# Altium PCB PowerMonitoring.PcbDoc
Units mil, origin at the board's own origin, x right, y up, seen from the top; angles counter-clockwise.
Board outline 3150 x 5906 mil, 2 copper layers (Top Layer, Bottom Layer); 66 components, 41 nets, 204 pads, 2 vias.
Unrouted connection lines stored in the file: 114.
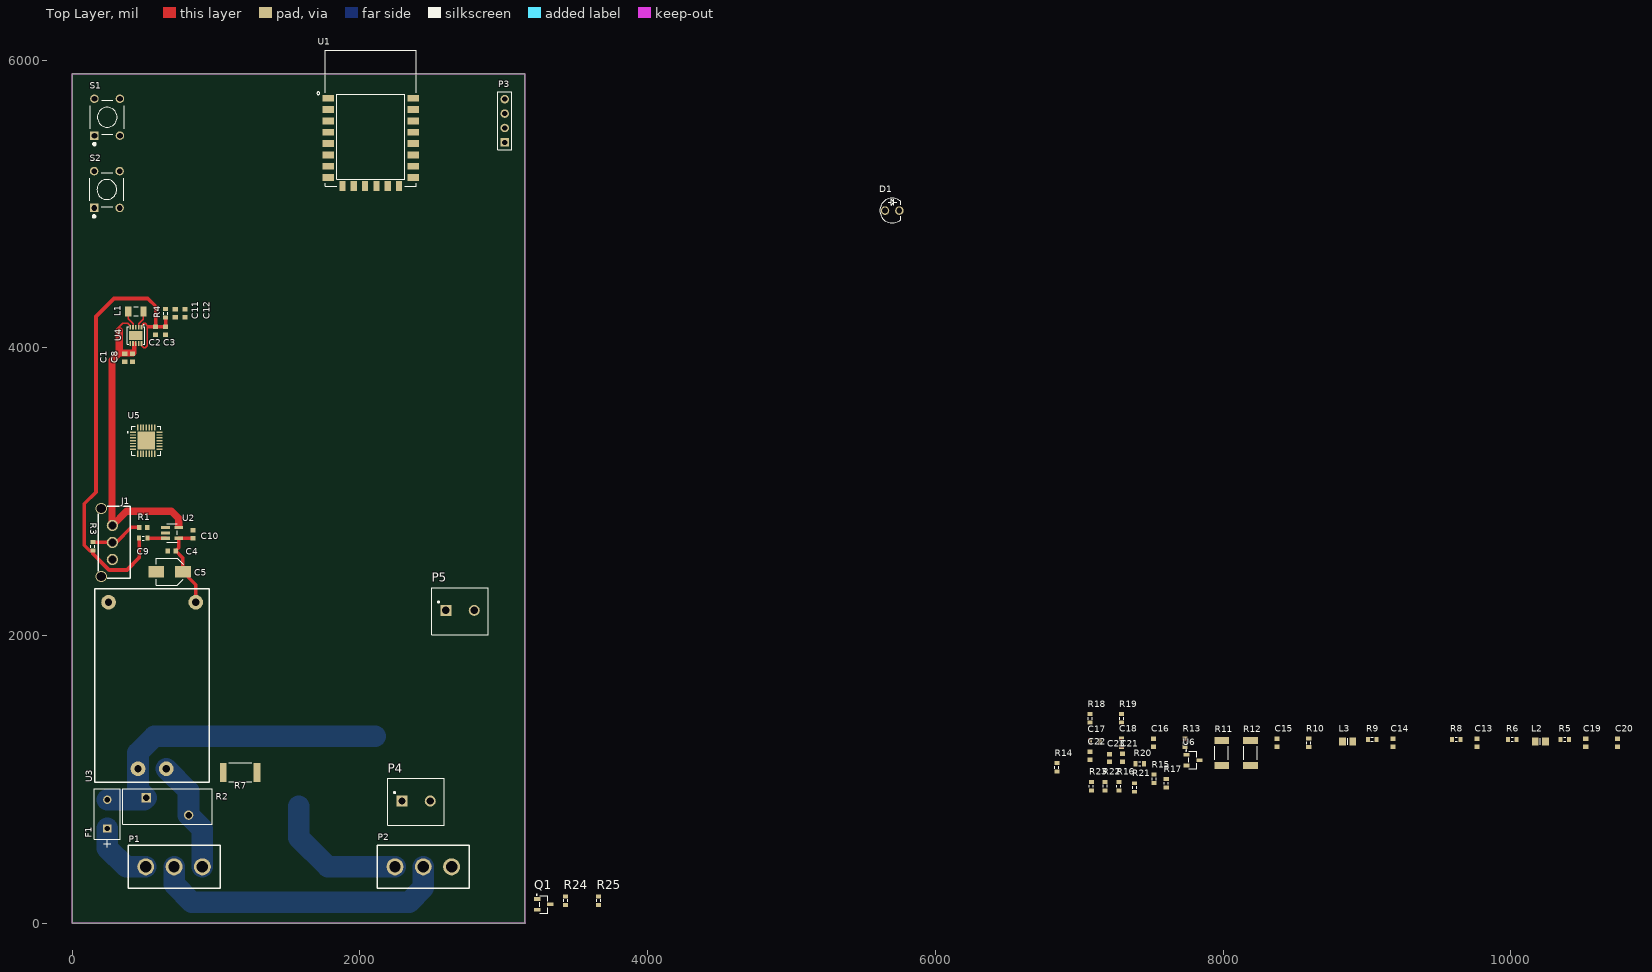
[diagram p0: Top Layer view]
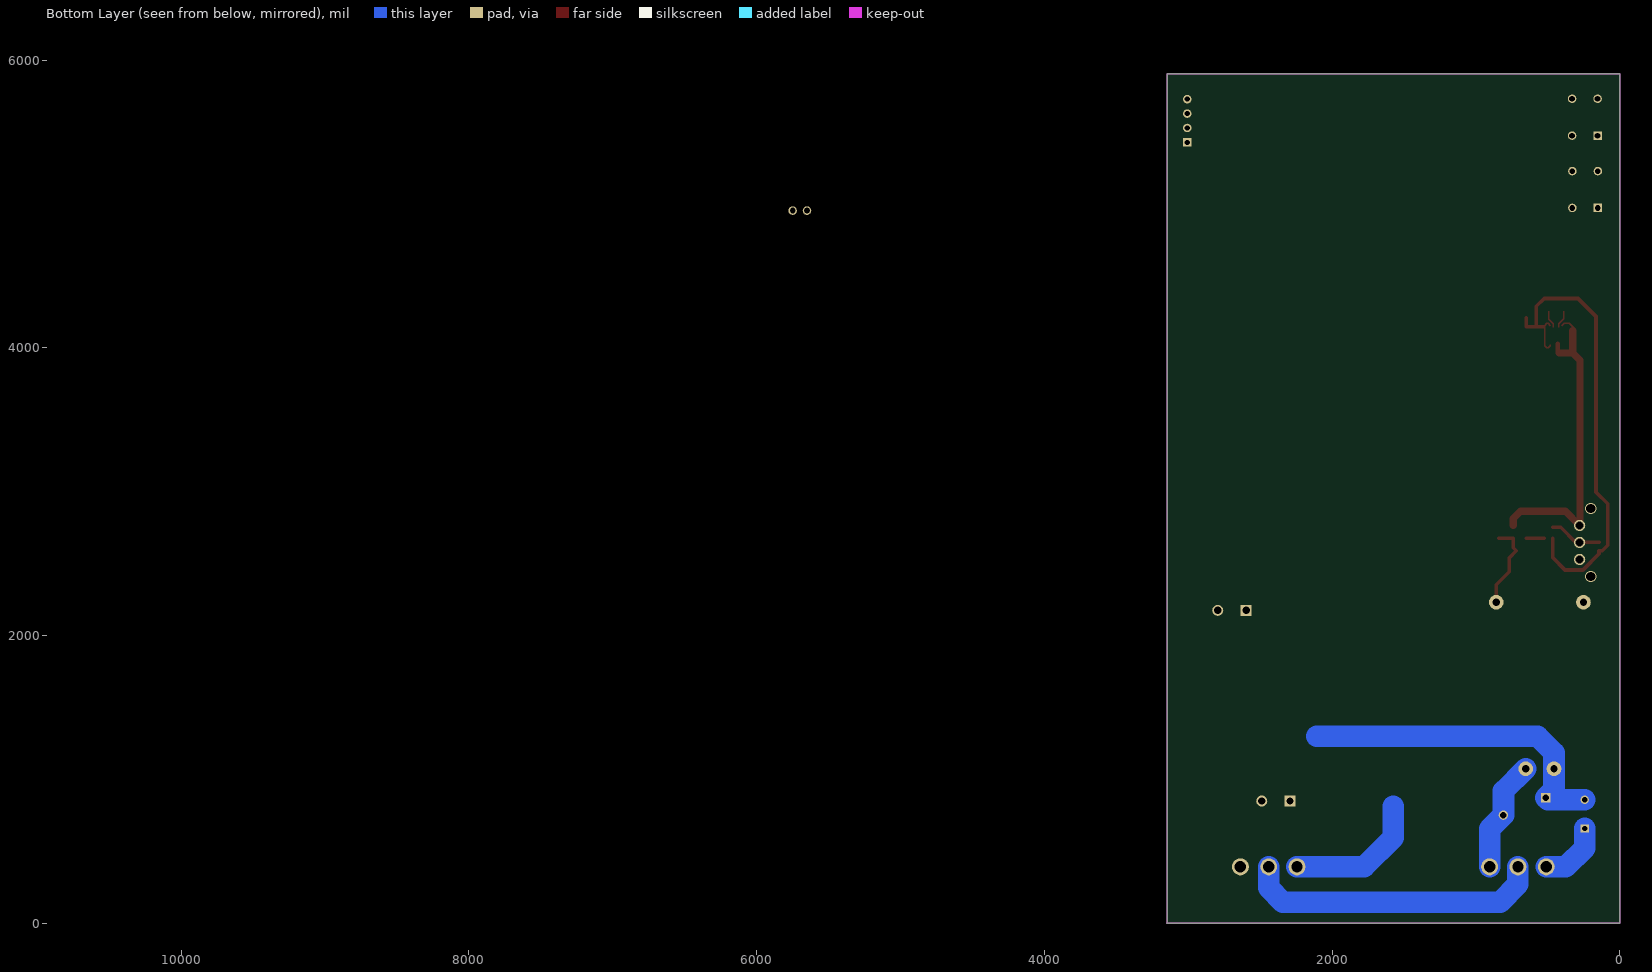
[diagram p1: Bottom Layer view, seen from below]

## Layer stack, top to bottom
Top Solder: solder mask 0.4, Solder Resist, Dk 3.5
Top Layer: signal copper 1.4
Dielectric 1: dielectric 12.6, FR-4, Dk 4.8
Bottom Layer: signal copper 1.4
Bottom Solder: solder mask 0.4, Solder Resist, Dk 3.5

## Board outline
0,0 0,5906 3146,5906 3146,4 3150,0

## Design rules (kind name [scope] priority, off if disabled: settings)
Clearance [All] p1: gap=10 ignorepadtopadclearanceinfootprint=FALSE except(0: Arc-Hole Track-Hole SMDPad-Hole THPad-Hole Via-Hole Fill-Hole Poly-Hole Region-Hole Text-Hole; 7.5: Arc-SMDPad Track-SMDPad SMDPad-SMDPad)
PolygonConnect [All] p1: connectstyle=Relief reliefconductorwidth=10 reliefentries=4 polygonreliefangle="90 Angle" airgapwidth=10
RoutingVias [All] p1: holewidth=28 width=50 viastyle="Through Hole" minholewidth=28 minwidth=50 maxholewidth=28 maxwidth=50
SolderMaskExpansion [All] p1: expansion=4
Width [All] p1: maxlimit=200 minlimit=10 preferedwidth=100 minimp=50.000000 maximp=50.000000 favimp=50.000000
30 further rules are at their usual default settings.

## Classes and differential pairs
component class Meter: C13 C14 C15 C16 C17 C18 C19 C20 C21 C22 L2 L3 R5 R6 R7 R8 R9 R10 R11 R12 R13 R14 R15 U5 U6
component class PowerSupply: C1 C2 C3 C4 C5 C8 C9 C10 C11 C12 F1 J1 L1 P1 P2 P4 P5 Q1 R1 R2 R3 R4 R24 R25 U2 U3 U4
component class CoreProcessor: C23 D1 P3 R16 R17 R18 R19 R20 R21 R22 R23 S1 S2 U1

## Components (designator, comment, footprint, x,y, rotation, side; value= is the part's Value field where it differs from the comment)
C1 "MUDAR FOOTPRINT" 1608[0603] 366,3932 r90 top value=10uF
C2 "MUDAR FOOTPRINT" 1608[0603] 581,4120 r90 top value=10uF
C3 "MUDAR FOOTPRINT" 1608[0603] 650,4119.56 r90 top value=10uF
C4 "MUDAR FOOTPRINT" 1608[0603] 692.56,2590 r0 top value=1uF
C5 "Cap Pol1" EEE-1VA100WR 675,2445 r180 top value=10uF
C8 "MUDAR FOOTPRINT" 1608[0603] 421,3932.56 r90 top value=1uF
C9 "MUDAR FOOTPRINT" 1608[0603] 495,2753 r180 top value=1uF
C10 "MUDAR FOOTPRINT" 1608[0603] 840,2705.56 r270 top value=0.1uF
C11 "MUDAR FOOTPRINT" 1608[0603] 717,4242 r90 top value=10uF
C12 "MUDAR FOOTPRINT" 1608[0603] 784,4242 r90 top value=0.1uF
C13 "MUDAR FOOTPRINT" 1608[0603] 9765,1255 r90 top value=33nF
C14 "MUDAR FOOTPRINT" 1608[0603] 9180,1255 r90 top value=33nF
C15 "MUDAR FOOTPRINT" 1608[0603] 8375,1255 r90 top value=33nF
C16 "MUDAR FOOTPRINT" 1608[0603] 7515,1255 r90 top value=33nF
C17 "MUDAR FOOTPRINT" C0805 7110,1265 r0 top value=10uF
C18 "MUDAR FOOTPRINT" 1608[0603] 7295,1255 r90 top value=0.1uF
C19 "MUDAR FOOTPRINT" 1608[0603] 10520,1255 r90 top value=0.1uF
C20 "MUDAR FOOTPRINT" 1608[0603] 10740,1255 r90 top value=0.1uF
C21 "MUDAR FOOTPRINT" 1608[0603] 7300,1152.56 r90 top value=0.1uF
C22 "MUDAR FOOTPRINT" 1608[0603] 7075,1165 r90 top value=0.1uF
C23 "MUDAR FOOTPRINT" 1608[0603] 7210,1150 r90 top value=0.1uF
D1 "LED0" LED-3MM-ROUND 5700,4955 r0 top
F1 "RSTA 1 AMMO" RSTA 245,860 r90 top
J1 "Battery_Connector" Battery_Connector 202.83,2648.11 r270 top
L1 "Inductor" INDC3216 443,4254 r0 top value=10mH
L2 "FERRITE BEAD" 6-0805_N 10205,1265 r0 top value=10mH
L3 "FERRITE BEAD" 6-0805_N 8865,1265 r0 top value=10mH
P1 "SUPPLY" TERM_BLOCK 708.66,393.7 r0 top
P2 "LOAD" TERM_BLOCK 2440.95,393.7 r0 top
P3 "PROG_HEADER" HDR1X4 3007,5429 r90 top
P4 "1935161" PHOENIX_1935161 2391,851 r0 top
P5 "1935161" PHOENIX_1935161 2696.57,2176 r0 top
Q1 "BSS138" MCP9700 3278,133 r0 top
R1 "Res3" J1-0603 495,2678 r180 top value=1K
R2 "ERZ-V14D431" VARISTOR 810,753 r0 top value=V14E275P
R3 "Res3" J1-0603 145,2620.47 r270 top value=1K
R4 "Res3" J1-0603 650,4240 r90 top value=33R
R5 "Res3" J1-0603 10375,1280 r0 top value=4.7K
R6 "Res3" J1-0603 10010,1280 r0 top value=1K
R7 "SHUNT" RES2512 1168,1051 r180 top value=1K
R8 "Res3" J1-0603 9620,1280 r0 top value=2.49R
R9 "Res3" J1-0603 9035,1280 r0 top value=1K
R10 "Res3" J1-0603 8595,1255 r90 top value=1K
R11 "Res3" 12Z-2010 7990,1185 r90 top value=499K
R12 "Res3" 12Z-2010 8190,1185 r90 top value=499K
R13 "Res3" J1-0603 7735,1255 r90 top value=1K
R14 "Res3" J1-0603 6845,1084.53 r90 top value=4.7K
R15 "Res3" J1-0603 7520,1004.53 r90 top value=100R
R16 "Res3" J1-0603 7275,954.53 r270 top value=10K
R17 "Res3" J1-0603 7605,974.53 r90 top value=2.1K
R18 "Res3" J1-0603 7075,1425 r90 top value=10K
R19 "Res3" J1-0603 7295,1425 r90 top value=10K
R20 "Res3" J1-0603 7420.47,1110 r0 top value=470R
R21 "Res3" J1-0603 7385,945 r90 top value=10K
R22 "Res3" J1-0603 7180,955 r90 top value=2.1K
R23 "Res3" J1-0603 7085,954.53 r90 top value=10K
R24 "Res3" J1-0603 3430,159 r90 top value=1K
R25 "Res3" J1-0603 3660,159 r90 top value=1K
S1 "FSM8JH" SW_FSM8JH 244,5604 r90 top
S2 "FSM8JH" SW_FSM8JH 241.58,5101.05 r90 top
U1 "ESP-12F" XCVR_ESP8266-12E/ESP-12E 2076,5460 r0 top
U2 "MAX1555EZK+T" MAX1555 695,2715 r0 top
U3 "HLK-PM01" HLK-PM01 556.57,1075 r90 top
U4 "ADP2504_3.3" ADP2504 443,4087 r270 top
U5 "MCP39F521" MCP39F521 515.32,3355.73 r0 top
U6 "MCP9700T-E/TT" MCP9700 7790,1135 r0 top

## Footprints (in the part's own frame and the unit in brackets; to place one, negate y for a bottom-side part, rotate by r counter-clockwise, add the part's x,y. Pads: shape width x height; smd on the part's side, far side on the other; paste and mask are expansions set on the pad)
6-0805_N [mm] "Chip Resistor, Body 2.0x1.2mm, IPC Medium Density"
  rect 1.2x1.4 smd: 1(-0.9,0) 2(0.9,0)
  silkscreen extent 0,-0.6 0,0.6, body extent -1.07,-0.7 1.07,0.7, height 0.7
12Z-2010 [mm] "Chip Resistor, Body 5.0x2.5mm, IPC High Density"
  rect 1.2x2.6 smd: 1(-2.2,0) 2(2.2,0)
  silkscreen extent -1.2,-1.2 1.2,1.2, body extent -2.58,-1.33 2.58,1.33, height 0.9
1608[0603] [mm] "Chip Capacitor, Body 1.6x0.8mm, IPC High Density"
  rect 0.8x0.9 smd: 1(-0.7,0) 2(0.7,0)
  body extent -0.87,-0.48 0.87,0.48, height 1.3
ADP2504 [mm] "SON50P300X300X80-11N"
  rect 0.84x0.27 smd: 1(-1.44,1) 2(-1.44,0.5) 3(-1.44,0) 4(-1.44,-0.5) 5(-1.44,-1) 6(1.44,-1) 7(1.44,-0.5) 8(1.44,0) 9(1.44,0.5) 10(1.44,1)
  rect 1.64x2.38 smd: 11(0,0)
  silkscreen extent -1.95,-1.55 1.55,1.55, body extent -1.55,-1.55 1.55,1.55, height 0.79
Battery_Connector [mm] "Battery_Connector"
  round 2 hole 1.4: 1(-3,1.96) 2(0,1.96) 3(3,1.96)
  silkscreen extent -6.35,-0.51 6.35,5.08, body extent -6.32,-0.51 6.33,5.1, height 9.95
C0805 [mil]
  rect 27.56x47.24 smd: 1(-33.46,0) 2(33.46,0)
EEE-1VA100WR [mil] "CAP_LM1117"
  rect 110x78 smd: 1(-95,0) 2(90,0)
  silkscreen extent -96,-94 91,94, body extent -108,-88 109,89, height 219
HDR1X4 [mm] "Connector; Header; 4 Position"
  rect 1.5x1.5 hole 0.9: 1(0,0)
  round 1.5 hole 0.9: 2(2.54,0) 3(5.08,0) 4(7.62,0)
  silkscreen extent -1.27,-1.27 8.89,1.27
HLK-PM01 [mm] "5V/3W POWER SUPPLY"
  round 2.6 hole 1.3: 1(0,2.5) 2(0,-2.5) 3(29.4,7.7) 4(29.4,-7.7)
  silkscreen extent -2.41,-10.1 31.75,10.1, body extent -2.27,-10.17 31.73,10.03, height 15.12
INDC3216 [mm] "Chip Inductor, Body 3.2x1.6mm, IPC High Density"
  rect 1.1x1.8 smd: 1(-1.35,0) 2(1.35,0)
  silkscreen extent -0.4,-0.8 0.4,0.8, body extent -1.7,-0.9 1.7,0.9, height 0.55
J1-0603 [mm] "Chip Resistor, Body 1.6x0.8mm, IPC High Density"
  rect 0.7x0.9 smd: 1(-0.75,0) 2(0.75,0)
  silkscreen extent -0.2,-0.35 0.2,0.35, body extent -0.85,-0.48 0.85,0.48, height 0.9
LED-3MM-ROUND [mm]
  round 1.508 hole 1: 1(1.27,0) 2(-1.27,0)
  silkscreen extent -2.19,-2.19 1.5,2.19, body extent -2,-2 1.5,2, height 6.05
MAX1555 [mil]
  rect 60x22 smd: 1(-46,37.4) 2(-46,0) 3(-46,-37.4) 4(46,-37.4) 5(46,37.4)
  silkscreen extent -37,-64 37,64, body extent -54,-59 54,59, height 43
MCP39F521 [mm] "QFN50P500X500X100-29N"
  rect 1.11x0.26 smd: 1(-2.33,1.5) 2(-2.33,1) 3(-2.33,0.5) 4(-2.33,0) 5(-2.33,-0.5) 6(-2.33,-1) 7(-2.33,-1.5) 15(2.33,-1.5) 16(2.33,-1) 17(2.33,-0.5) 18(2.33,0) 19(2.33,0.5) 20(2.33,1) 21(2.33,1.5)
  rect 0.26x1.11 smd: 8(-1.5,-2.33) 9(-1,-2.33) 10(-0.5,-2.33) 11(0,-2.33) 12(0.5,-2.33) 13(1,-2.33) 14(1.5,-2.33) 22(1.5,2.33) 23(1,2.33) 24(0.5,2.33) 25(0,2.33) 26(-0.5,2.33) 27(-1,2.33) 28(-1.5,2.33)
  rect 3.15x3.15 smd: 29(0,0)
  silkscreen extent -3.35,-2.58 2.58,2.58, body extent -2.58,-2.58 2.58,2.58, height 0.9
MCP9700 [mm] "SOT95P237X112-3N"
  rect 1.1x0.65 smd: 1(-1.15,0.95) 2(-1.15,-0.95) 3(1.15,0)
  silkscreen extent -1.3,-1.55 0.69,1.8, body extent -1.3,-1.45 1.3,1.45, height 1
PHOENIX_1935161 [mm]
  rect 1.95x1.95 hole 1.3: 1(-2.5,0)
  round 1.95 hole 1.3: 2(2.5,0)
  silkscreen extent -5,-4.3 5,4, body extent -5,-4.25 5,4.25, height 15.6
RES2512 [mil]
  rect 47x132 smd: 1(-117,0) 2(117,0)
  silkscreen extent -80,-66 80,66, body extent -124,-61 124,61, height 22
RSTA [mil]
  rect 58x58 hole 38 mask-1000: 1(-200,0)
  round 58 hole 38 mask-1000: 2(0,0)
  silkscreen extent -330,-90 76,90, body extent -271,-84 71,84, height 319
SW_FSM8JH [mm]
  rect 1.498x1.498 hole 0.99: 1(-3.25,2.25)
  round 1.498 hole 0.99: 2(3.25,2.25) 3(-3.25,-2.25) 4(3.25,-2.25)
  silkscreen extent -4.95,-3 3,3, body extent -3.9,-2.99 3.9,3, height 9.5
TERM_BLOCK [mm] "BLUE"
  round 3 hole 2: 1(-5,0) 2(0,0) 3(5,0)
  silkscreen extent -8.13,-3.81 8.13,3.81, body extent -8.1,-3.75 8.1,3.75, height 9.95
VARISTOR [mil] "RES_ERZV14_155X6"
  rect 65x65 hole 45 mask-1000: 1(-295,122)
  round 65 hole 45 mask-1000: 2(0,0)
  silkscreen extent -458,-62 162,184, body extent -450,-58 160,178, height 728
XCVR_ESP8266-12E/ESP-12E [mm]
  rect 2x1.2 smd: 1(-7.5,7) 2(-7.5,5) 3(-7.5,3) 4(-7.5,1) 5(-7.5,-1) 6(-7.5,-3) 7(-7.5,-5) 8(-7.5,-7) 15(7.5,-7) 16(7.5,-5) 17(7.5,-3) 18(7.5,-1) 19(7.5,1) 20(7.5,3) 21(7.5,5) 22(7.5,7)
  rect 1.1x1.7 smd: 9(-5,-8.5) 10(-3,-8.5) 11(-1,-8.5) 12(1,-8.5) 13(3,-8.5) 14(5,-8.5)
  silkscreen extent -9.5,-8.5 8,15.5, body extent -7.95,-8.51 8.06,15.49, height 2.65

## Part data
C1 C2 C3 C4 C8 C9 C10 C11 C12 C13 C14 C15 C16 C17 C18 C19 C20 C21 C22 C23: library part "Cap Semi", "Capacitor (Semiconductor SIM Model)", LatestRevisionDate=29-May-2009, LatestRevisionNote="IPC-7351 Footprint Added.", PackageDescription="Chip Capacitor", PackageReference=C1206, Published=8-Jun-2000, Publisher="Altium Limited"
C5: "Polarized Capacitor (Radial)", LatestRevisionDate=17-Jul-2002, LatestRevisionNote="Re-released for DXP Platform.", PackageDescription="Polarized Capacitor (Radial); 2 Leads", PackageReference=RB7.6-15, Published=8-Jun-2000, Publisher="Altium Limited"
D1: "Typical INFRARED GaAs LED", LatestRevisionDate=08-Jul-2005, LatestRevisionNote="Mech Layer 1 removed.", PackageDescription="LED; 2 Leads", PackageReference=LED-0, Published=8-Jun-2000, Publisher="Altium Limited"
L2 L3: library part "Inductor Iron", "Magnetic-Core Inductor", Supplier Part Number 1=240-2384-6-ND, LatestRevisionDate=17-Jul-2002, LatestRevisionNote="Re-released for DXP Platform.", PackageDescription="Axial Device, Thru-Hole; 2 Leads; 0.9 in Pin Spacing", PackageReference=AXIAL-0.9, Published=24-Mar-1999, Publisher="Altium Limited", Supplier 1=Digi-Key
P1 P2: library part "Header 3", "Header, 3-Pin", LatestRevisionDate=17-Jul-2002, LatestRevisionNote="Re-released for DXP Platform.", Publisher="Altium Limited"
P3: library part "Header 4", "Header, 4-Pin", LatestRevisionDate=17-Jul-2002, LatestRevisionNote="Re-released for DXP Platform.", Publisher="Altium Limited"
P4 P5: library part "Header 2", "Header, 2-Pin", LatestRevisionDate=17-Jul-2002, LatestRevisionNote="Re-released for DXP Platform.", Publisher="Altium Limited"
Q1: library part NMOS-2, "N-Channel Power MOSFET", ComponentLink1Description="Manufacturer Link", ComponentLink1URL=http://www.irf.com/, DatasheetVersion=PD-9.814, LatestRevisionDate=17-Jul-2002, LatestRevisionNote="Re-released for DXP Platform.", Note="Pin 2 is electrically connected to pin 4.", PackageDescription="TO, Thru-Hole, Vertical, Heatsink Mounted; 3 In-Line Leads; Pitch 2.54 mm", PackageReference=TO-220AB, PackageVersion=Feb-1997, Published=8-Jun-2000, Publisher="Altium Limited"
R1 R3 R4 R5 R6 R8 R9 R10 R11 R12 R13 R14 R15 R16 R17 R18 R19 R20 R21 R22 R23 R24 R25: "Resistor", LatestRevisionDate=29-May-2009, LatestRevisionNote="IPC-7351 Footprint Added.", PackageDescription="Chip Resistor", PackageReference=J1-0603, Published=8-Jun-2000, Publisher="Altium Limited"
R7: library part Res3, "Resistor", Supplier Part Number 1=CSNL2512FT2L00DKR-ND, LatestRevisionDate=29-May-2009, LatestRevisionNote="IPC-7351 Footprint Added.", PackageDescription="Chip Resistor", PackageReference=J1-0603, Published=8-Jun-2000, Publisher="Altium Limited", Supplier 1=Digi-Key
S1 S2: library part BUTTON, "Switch, Pushbutton, Tactile, SPST, Thru Hole, Vertical, 6MM, Black", Package=None, Availability=Good, MF="TE Connectivity / Alcoswitch", MP=FSM8JH, Price="0.07 USD", SnapEDA_Link=https://www.snapeda.com/parts/FSM8JH/TE%2520Connectivity%2520/%2520Alcoswitch/view-part/?ref=snap
U2: "Charger IC Lithium-Ion TSOT-23-5", Built_By=EMA_UL_Team, C="Copyright (C) 2015 Accelerated Designs. All rights reserved", Manufacturer_Part_Number=MAX1555EZK+T, Vendor="Maxim Integrated Products"
U4: library part ADP2504_3.3V, "Buck-Boost Switching Regulator IC Positive Fixed 3.3V 1 Output 1A 10-WFDFN Exposed Pad, CSP"
U5: Supplier Part Number 1=MCP39F521-E/MQ-ND, Supplier 1=Digi-Key
U6: "MCP9700 Series 5 V -40 to +125°C Low-Power Linear Active Thermistor", Package="SOT-23-3 Microchip", Availability=Unavailable, MF=Microchip, MP=MCP9700T-E/TT, Price=None, SnapEDA_Link=https://www.snapeda.com/parts/MCP9700T-E/TT/Microchip/view-part/?ref=snap
F1: Built_By=EMA_UL_Team, Manufacturer_Part_Number="RSTA 1 AMMO", Vendor=BelFuse
L1: Code_IEC=1005, Code_JEITA=0402, LatestRevisionDate=29-May-2009, LatestRevisionNote="IPC-7351 Footprint Added.", PackageDescription="Chip Inductor", PackageReference=0402-A, Published=8-Jun-2000, Publisher="Altium Limited"
R2: Built_By=EMA_UL_Team, C="Copyright (C) 2015 Accelerated Designs. All rights reserved", Manufacturer_Part_Number=ERZ-V14D431, Vendor=Panasonic

## Via types
v1: diameter 78.74, hole 62.99, Top Layer to Bottom Layer, 2 vias

## Nets (pads, with @x,y where several pads share a name; then routed paths per layer and width w, separated by ;. In a path a pad name is that pad's centre, name@x,y a point inside that pad or via, vN(x,y) a via of type N, cw(c..) or ccw(c..) an arc to the next point about the centre after c; other vN are vias at no path point)
+3.3: C2.2 C3.2 C20.2 C23.2 D1.1 P3.1 Q1.1 R1.2 R3.2 R4.1 R5.1 R14.2 R16.1 R17.2 R18.2 R19.2 R22.2 R23.1 R24.2 U1.8 U4.1 U4.10 | length 3323.5
  Top Layer w10: U4.10@483,4021 483,4017 499,4001 509,4001 523,4015 523,4156 509,4170 498,4170 U4.1@483,4155
  Top Layer w25: R1.2 465.47,2540.94 381.53,2457 257,2457 145,2569 R3.2 122.06,2590.94 85,2628 85,2917 166,2998 166,4219 291,4344 526,4344 581,4289 C2.2 ; 531,4147.56 C2.2 ; R4.1 C3.2 649.56,4147.56 C2.2
+3.3A: C11.2 C12.2 C19.2 R4.2 U5.11 U5.25
+5: C4.2 C5.1 C10.2 P5.1 R25.2 U2.4 U3.4 | length 610.8
  Top Layer w25: C10.2 741.4,2678 U2.4 741,2610.88 C4.2 770,2540.12 C5.1 859.72,2355.28 U3.4
AGND: C1.1 C2.1 C3.1 C4.1 C5.2 C8.1 C9.1 C10.1 C11.1 C12.1 C13.1 C14.2 C15.1 C16.1 C17.1 C18.1 C19.1 C20.1 C21.1 C22.1 C23.1 J1.3 P3.4 R10.2 R13.2 R21.2 S1.1 S1.2 S2.1 S2.2 U1.15 U2.2 U3.3 U4.3 U4.6 U4.9 U4.11 U5.12 U5.15 U5.21 U5.24 U5.27 U5.29 U6.3
GROUND: P1.2 P2.2 | length 2092.9
  Bottom Layer w150: P1.2 708.66,272.34 833,148 2342,148 2440.94,246.94 P2.2
LINE: F1.1 P1.1 | length 456.8
  Bottom Layer w150: F1.1 245,524 375.3,393.7 P1.1
NetC9_2: C9.2 J1.2 R3.1 U1.2 | length 366.7
  Top Layer w25: R3.1 278.11,2650 J1.2 306.11,2648.11 411,2753 C9.2
NetC13_2: C13.2 R6.1 U5.16
NetC14_1: C14.1 R9.1 U5.17
NetC15_2: C15.2 R10.1 U5.19
NetC16_2: C16.2 R12.1 R13.1 U5.18
NetC17_2: C17.2 C18.2 U5.23
NetC22_2: C22.2 U6.1
NetD1_2: D1.2 R20.2
NetF1_2: F1.2 P4.1 R2.1 R11.2 U3.1 | length 2309.3
  Bottom Layer w150: F1.2 500,860 R2.1 458.15,931.85 U3.1 458.15,1187.15 573,1302 2108,1302
NetL1_1: L1.1 U4.4 | length 124.2
  Top Layer w10: L1.1 389.85,4203.15 423.31,4169.69 U4.4
NetL1_2: L1.2 U4.2 | length 124.2
  Top Layer w10: U4.2 462.69,4167.69 496.15,4201.15 L1.2
NetL2_1: L2.1 P1.3 R2.2 R7.2 U3.2 | length 785.1
  Bottom Layer w150: U3.2 809,921 809,754 R2.2 905.51,657.49 P1.3
NetL2_2: L2.2 R6.2 R8.2
NetL3_1: L3.1 P2.3 R7.1
NetL3_2: L3.2 R8.1 R9.2
NetP2_1: P2.1 P4.2 | length 971.3
  Bottom Layer w150: 1575,815 1575,597 1778.3,393.7 P2.1
NetQ1_3: Q1.3 R24.1 U1.4
NetR1_1: R1.1 U1.5 U2.3 | length 124.6
  Top Layer w25: R1.1 648.6,2678 U2.3
NetR5_2: R5.2 U5.10
NetR11_1: R11.1 R12.2
NetR14_1: R14.1 U5.26
NetR15_1: R15.1 U6.2
NetR16_2: R16.2 U1.3
NetR17_1: R17.1 U1.20 U5.14
NetR20_1: R20.1 U1.6
NetR21_1: R21.1 U1.16
NetR22_1: R22.1 U1.19 U5.13
NetR23_2: R23.2 U1.17
PROG: R19.1 S2.3 S2.4 U1.18
PROG_RX: P3.2 U1.21
PROG_TX: P3.3 U1.22
RST: R18.1 S1.3 S1.4 U1.1
SSR_ACTI: P5.2 Q1.2 R25.1
TEMP_SENS: C21.2 R15.2 U5.20
V_Battery: C1.2 C8.2 J1.1 U2.5 U4.5 U4.7 U4.8 | length 2223.7
  Top Layer w10: 312.5,4132.5 351,4171 386,4171 U4.5@402.97,4154.03
  Top Layer w30: C8.2@433,3963 433,4030.31
  Top Layer w50: 328.2,4121 328.2,3965 ; C8.2@422,3965 328.2,3965 ; 741,2765 741,2814 690,2865 378.78,2865 J1.1 277.2,2769.02 277.2,3914 328.2,3965
pads on no net: U1.7 U1.9 U1.10 U1.11 U1.12 U1.13 U1.14 U2.1 U5.1 U5.2 U5.3 U5.4 U5.5 U5.6 U5.7 U5.8 U5.9 U5.22 U5.28
copper on no net:
  other v1: 202.83,2411.89 202.83,2884.33

## Keep-outs
Keep-Out Layer:
  the board outline again, w10